# EAGLE board schema (EAGLE 8.6.0)
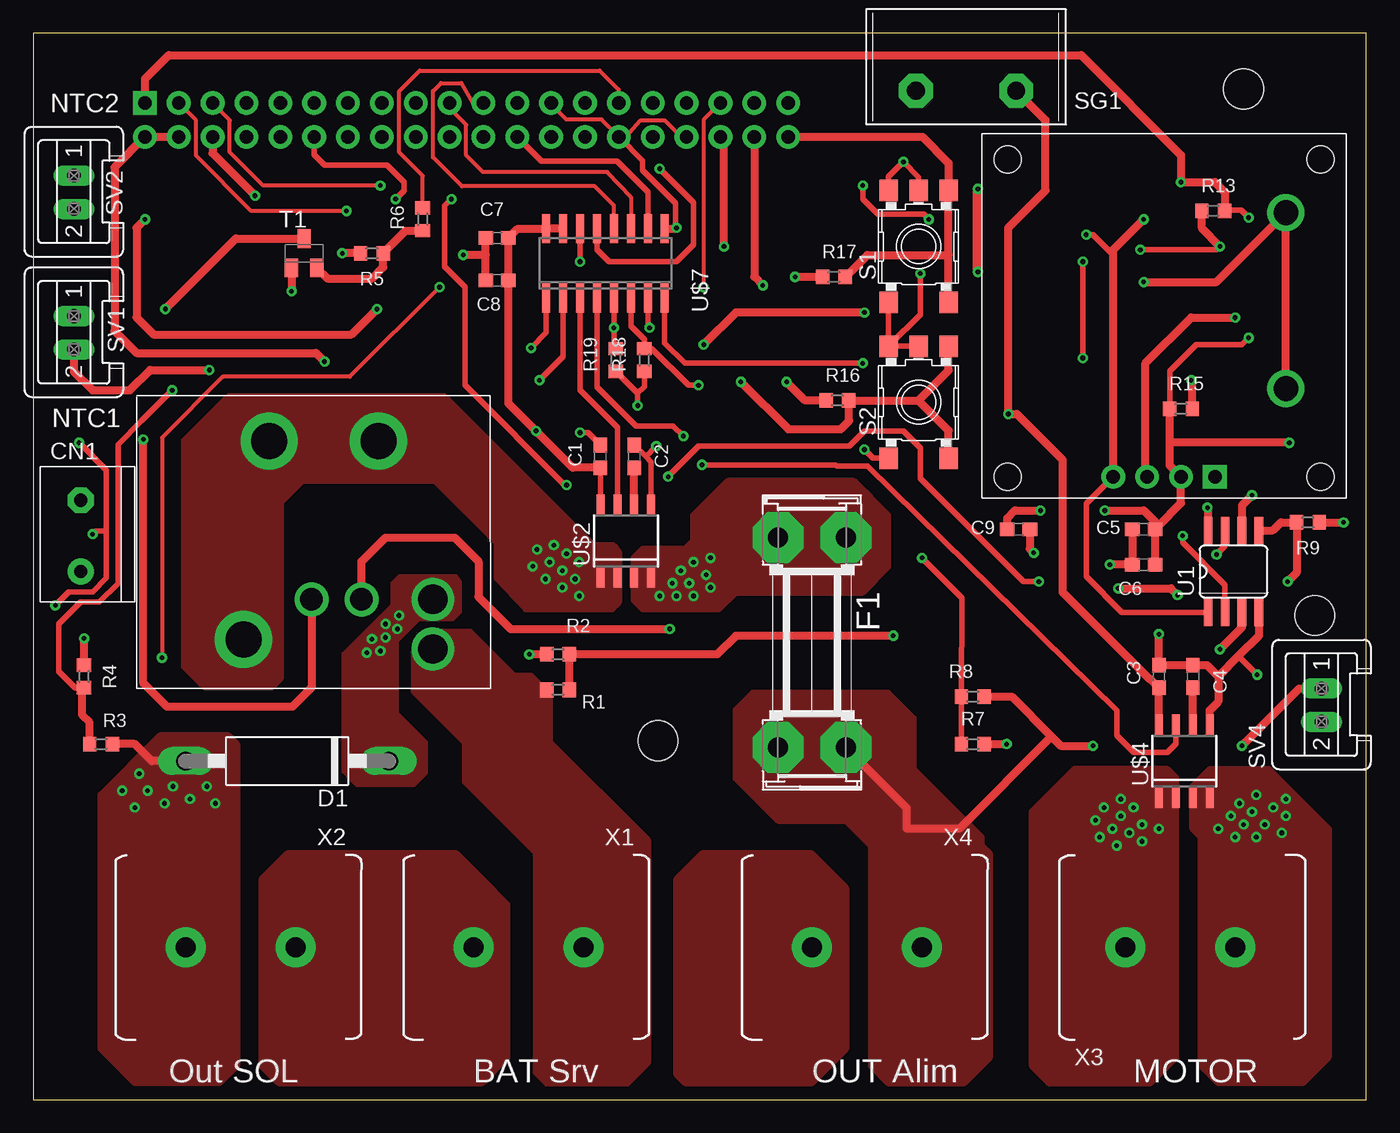
[diagram p0: board, top side]
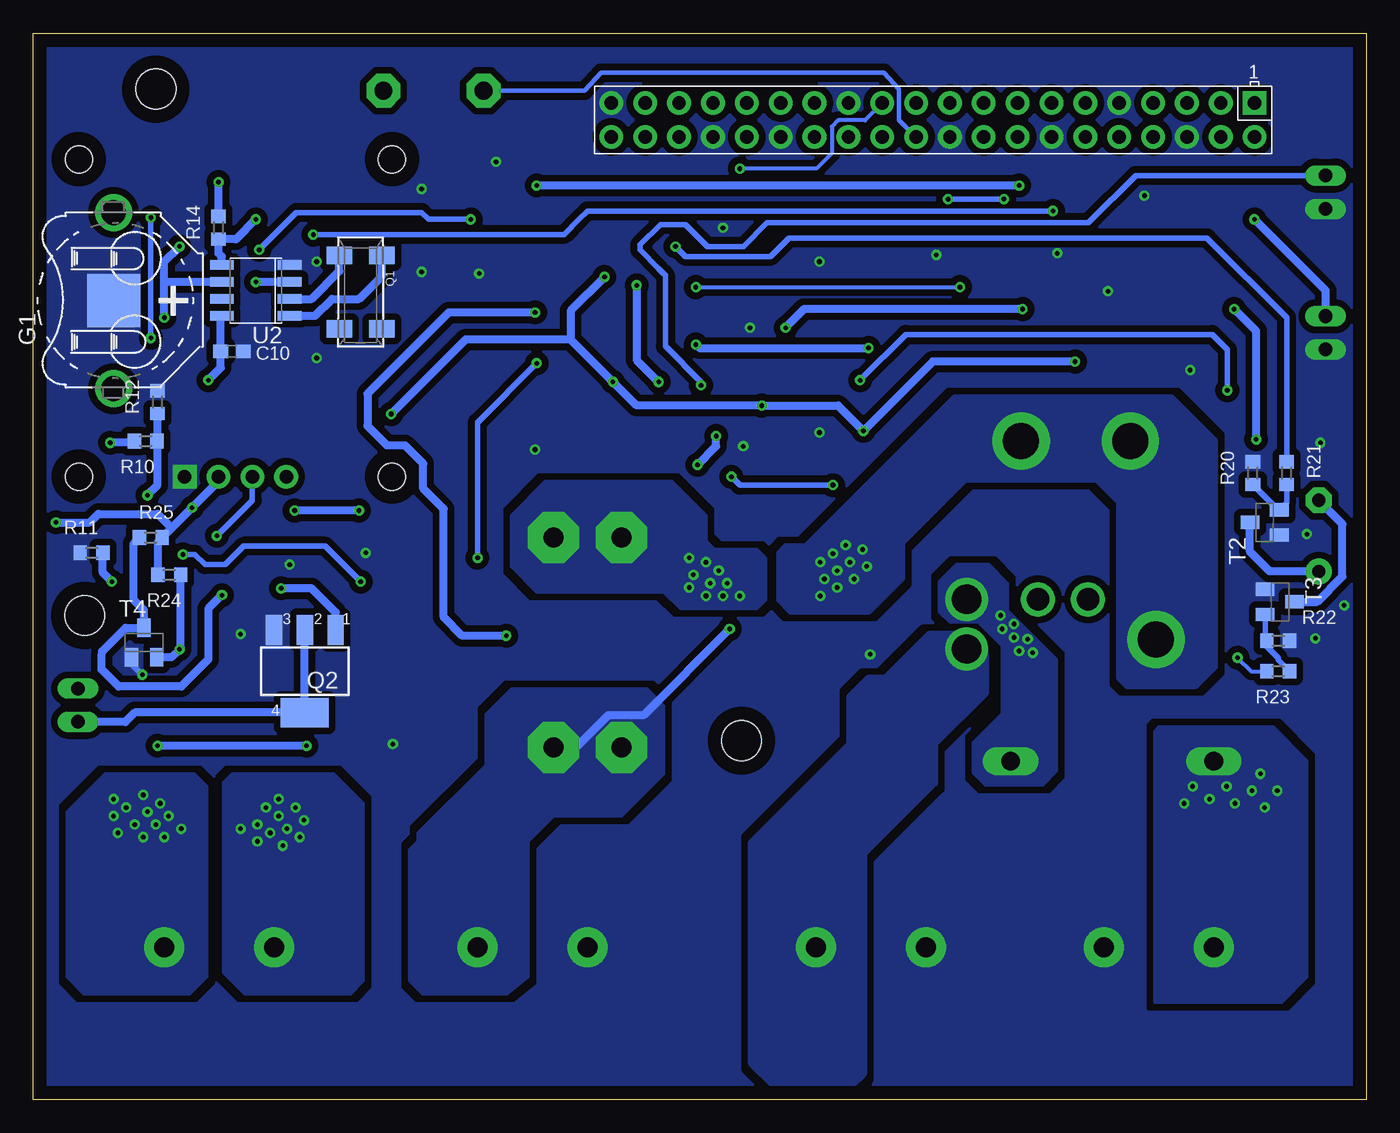
[diagram p1: board, bottom side, seen from below]

Size 100 x 80 mm. Coordinates in mm from the lower left corner, seen from the top.
Outline: 0,0 100,0 100,80 0,80 0,0
Copper layers (1*16): Top 0.035mm / dielectric 1.5mm / Bottom 0.035mm
Design rules "default *": minimum track width 8mil, minimum drill 0.35mm, track to track 8mil, track to pad 8mil, pad to pad 8mil, via to via 8mil, smd to smd 8mil, copper to edge 40mil, drill to drill 6mil, minimum pad ring 10mil, minimum via ring 8mil, stop-mask expansion 4mil, vias tented up to drill 0mil, thermal gap 10mil
Holes 3 mm at 90.81,75.82 96.14,36.32 46.86,26.92

## Footprints (pad centres in the part's own frame; a part is rotated, then mirrored left to right if it is on the bottom)
C0603 = smd 1.1 x 1: 1 -0.85,0; 2 0.85,0
CN02 = drill 1 pad 1.93 octagon: P$1 -2.794,0 | drill 1 pad 1.93: P$2 2.54,0
C1702-15 = drill 1.397 long: A 7.62,0; C -7.62,0
SHK20Q = drill 1.5 pad 3.81 octagon: 1A -7.874,2.54; 1B -7.874,-2.54; 2A 7.874,2.54; 2B 7.874,-2.54
CELL_RETAINER_11.6MM = smd 3.96 x 3.96: N- 0,0 | drill 1.85 pad 2.54: P+@1 -6.605,0; P+@2 6.605,0
8.2X3.8 = smd 1.3 x 1.9: 1 -2.75,-1.6; 2 2.75,-1.6; 3 2.75,1.6; 4 -2.75,1.6
SOT223 = smd 1.219 x 2.235: 1 -2.311,-3.099; 2 0,-3.099; 3 2.311,-3.099 | smd 3.6 x 2.2: 4 0,3.099
R0603 = smd 1 x 1.1: 1 -0.85,0; 2 0.85,0
HFKP-1X5 = drill 2.7 pad 4.3: COM$1 14.2,14.88; COM$2 12.28,0; COM$3 4.08,0 | drill 2.2 pad 3.1: NC 0,15.6; NO 0,11.87 | drill 1.7: P$1 5.35,11.87; P$2 9.1,11.87
SKHMPXE010 = smd 1.6 x 1.4: 1 -4.2,2.25; 2 4.2,2.25; 3 -4.2,-2.25; 4 4.2,-2.25; 5 4.2,0
B/C11S = drill 1.321 pad 2.54 octagon: 1 -3.759,0; 2 3.759,0
S02P = drill 1.016 long: 1 1.25,0; 2 -1.25,0
SOT23-EBC = smd 1 x 1.4: B 0.95,-1.1; C 0,1.1; E -0.95,-1.1
SO08 = smd 0.66 x 2.032: 1 -1.905,-3.073; 2 -0.635,-3.073; 3 0.635,-3.073; 4 1.905,-3.073; 5 1.905,3.073; 6 0.635,3.073; 7 -0.635,3.073; 8 -1.905,3.073
SO08-IRF = smd 0.72 x 1.78: 1 -1.905,-2.543; 2 -0.635,-2.543; 3 0.635,-2.543; 4 1.905,-2.543; 5 1.905,2.543; 6 0.635,2.543; 7 -0.635,2.543; 8 -1.905,2.543
RASPBERRYPI_V13_J8 = drill 1 pad 1.778 square: 1 2.02,-2.71 | drill 1 pad 1.778: 2 2.02,-0.17; 3 4.56,-2.71; 4 4.56,-0.17; 5 7.1,-2.71; 6 7.1,-0.17; 7 9.64,-2.71; 8 9.64,-0.17; 9 12.18,-2.71; 10 12.18,-0.17; 11 14.72,-2.71; 12 14.72,-0.17; 13 17.26,-2.71; 14 17.26,-0.17; 15 19.8,-2.71; 16 19.8,-0.17; 17 22.34,-2.71; 18 22.34,-0.17; 19 24.88,-2.71; 20 24.88,-0.17; 21 27.42,-2.71; 22 27.42,-0.17; 23 29.96,-2.71; 24 29.96,-0.17; 25 32.5,-2.71; 26 32.5,-0.17; 27 35.04,-2.71; 28 35.04,-0.17; 29 37.58,-2.71; 30 37.58,-0.17; 31 40.12,-2.71; 32 40.12,-0.17; 33 42.66,-2.71; 34 42.66,-0.17; 35 45.2,-2.71; 36 45.2,-0.17; 37 47.74,-2.71; 38 47.74,-0.17; 39 50.28,-2.71; 40 50.28,-0.17
SOIC8 = smd 0.6 x 1.5: 1 -1.905,-2.75; 2 -0.635,-2.75; 3 0.635,-2.75; 4 1.905,-2.75; 5 1.905,2.75; 6 0.635,2.75; 7 -0.635,2.75; 8 -1.905,2.75
OLED-SSD1306 = drill 1.016 pad 1.778 square: GND 3.81,0 | drill 1.016 pad 1.778: SCL -1.27,0; SDA -3.81,0; VCC 1.27,0 | hole 2.032: 11.748,0; 11.748,23.812; -11.748,23.812; -11.748,0
SO16 = smd 0.6 x 2.2: 1 -4.445,-2.6; 2 -3.175,-2.6; 3 -1.905,-2.6; 4 -0.635,-2.6; 5 0.635,-2.6; 6 1.905,-2.6; 7 3.175,-2.6; 8 4.445,-2.6; 9 4.445,2.6; 10 3.175,2.6; 11 1.905,2.6; 12 0.635,2.6; 13 -0.635,2.6; 14 -1.905,2.6; 15 -3.175,2.6; 16 -4.445,2.6
38700-7502 = drill 1.5 pad 3: 1 -8.25,0; 2 0,0

## Placement (x,y rotation side)
C1  [C0603]  42.55,48.26 90 top
C2  [C0603]  45.09,48.26 90 top
C3  [C0603]  84.45,31.75 90 top
C4  [C0603]  87,31.75 270 top
C5  [C0603]  83.31,42.8 180 top
C6  [C0603]  83.31,40.13 180 top
C7  [C0603]  34.8,64.64 180 top
C8  [C0603]  34.8,61.47 180 top
C9  [C0603]  73.91,42.8 180 top
C10  [C0603]  85.09,56.13 0 bottom
CN1  [CN02]  3.56,42.16 270 top
D1  Shottky 20A  [C1702-15]  19.05,25.4 180 top
F1  [SHK20Q]  58.42,34.29 270 top
G1  [CELL_RETAINER_11.6MM]  93.98,59.94 90 bottom
Q1  [8.2X3.8]  75.44,60.58 270 bottom
Q2  [SOT223]  79.63,32.13 180 bottom
R1  [R0603]  39.37,30.73 0 top
R2  [R0603]  39.37,33.4 180 top
R3  [R0603]  5.08,26.67 0 top
R4  [R0603]  3.81,31.75 270 top
R5  [R0603]  25.4,63.5 180 top
R6  [R0603]  29.21,66.04 90 top
R7  [R0603]  70.48,26.67 0 top
R8  [R0603]  70.48,30.23 180 top
R9  [R0603]  95.63,43.31 180 top
R10  [R0603]  91.57,49.4 0 bottom
R11  [R0603]  95.63,41.02 180 bottom
R12  [R0603]  90.68,52.32 90 bottom
R13  [R0603]  88.52,66.67 0 top
R14  [R0603]  86.11,65.41 90 bottom
R15  [R0603]  86.11,51.82 0 top
R16  [R0603]  60.33,52.45 0 top
R17  [R0603]  60.07,61.72 0 top
R18  [R0603]  45.85,55.5 90 top
R19  [R0603]  43.69,55.5 90 top
R20  [R0603]  8.51,46.99 90 bottom
R21  [R0603]  5.97,46.99 90 bottom
R22  [R0603]  6.6,34.42 0 bottom
R23  [R0603]  6.6,32.13 180 bottom
R24  [R0603]  89.79,39.37 180 bottom
R25  [R0603]  91.19,42.16 0 bottom
RL1  [HFKP-1X5]  29.97,49.4 180 top
S1  [SKHMPXE010]  66.42,64.01 90 top
S2  [SKHMPXE010]  66.42,52.32 90 top
SG1  [B/C11S]  69.98,75.69 180 top
SV1  [S02P]  3.05,57.53 90 top
SV2  [S02P]  3.05,68.07 90 top
SV4  [S02P]  96.65,29.59 90 top
T1  [SOT23-EBC]  20.32,63.5 0 top
T2  [SOT23-EBC]  7.62,43.31 90 bottom
T3  [SOT23-EBC]  6.48,37.34 270 bottom
T4  [SOT23-EBC]  91.69,34.29 0 bottom
U1  LM75  [SO08]  90.04,39.62 0 top
U2  [SO08-IRF]  83.31,60.71 90 bottom
U$1  RPI-ZERO  [RASPBERRYPI_V13_J8]  6.35,72.06 180 bottom
U$2  ACS712  [SOIC8]  44.45,41.91 0 top
U$4  ACS712  [SOIC8]  86.36,25.4 0 top
U$6  IIC_OLED_SSD1306  [OLED-SSD1306]  84.84,46.74 0 top
U$7  MCP3008SL  [SO16]  42.93,62.74 0 top
X1  38700-7502  [38700-7502]  33.02,11.43 180 top
X2  38700-7502  [38700-7502]  11.43,11.43 180 top
X3  38700-7502  [38700-7502]  90.17,11.43 0 top
X4  38700-7502  [38700-7502]  58.42,11.43 180 top

## Library data of the parts
C1-C10 = eagle-ltspice; SPICEMODEL: NONE; SPICEPREFIX: C
CN1 RL1 U2 U$1 U$2 U$4 U$6 = mylib
D1 = diode
F1 = fuse; OC_FARNELL: unknown; OC_NEWARK: unknown
G1 = battery; MF: KEYSTONE
Q1 = crystal-geyer_V1_0
Q2 = linear
R1-R25 = eagle-ltspice; SPICEMODEL: NONE; SPICEPREFIX: R
S1 S2 = switch
SG1 = buzzer
SV1 SV2 SV4 = con-amp-mt
T1 = transistor-neu-to92
T2-T4 = transistor
U1 = umaxim
U$7 = MCP3008
X1-X4 = mylib; OC_FARNELL: unknown; OC_MOUSER: 538-38700-7502; OC_NEWARK: unknown

## Nets
3V3: C5.1 C6.1 C9.2 R9.1 R10.1 R13.2 R14.2 R15.1 R24.2 R25.2 U1.8 U$1.1 U$6.VCC
+5V: C1.1 C3.1 C7.1 C8.1 R16.1 R17.1 R18.1 R19.1 SG1.1 U$1.2 U$1.4 U$2.8 U$4.8 U$7.15 U$7.16
CE0: U$1.24 U$7.10
GND: C1.2 C2.2 C3.2 C4.1 C5.2 C6.2 C7.2 C8.2 C9.1 C10.2 G1.N- Q2.3 R2.2 R4.1 R5.2 R7.2 R11.2 R12.2 R20.2 R22.2 S1.1 S1.2 S1.5 S2.1 S2.2 S2.5 SV1.2 SV2.2 T1.E T2.E T3.E T4.E U1.4 U2.4 U$1.6 U$1.9 U$1.14 U$1.20 U$1.25 U$1.30 U$1.34 U$1.39 U$2.5 U$4.5 U$6.GND U$7.7 U$7.9 U$7.14 X1.2 X2.1 X4.2
MEAS_0: R1.2 R2.1 U$7.1
MEAS_1: R3.1 R4.2 U$7.2
MEAS_C: U$2.7 U$7.3
MEAS_M: U$4.7 U$7.4
MEAS_O: R7.1 R8.2 U$7.8
MISO: U$1.21 U$7.12
MOSI: U$1.19 U$7.11
N$1: R1.1 RL1.NC X1.1
N$2: R9.2 R11.1 U1.5
N$3: RL1.COM$1 RL1.COM$2 RL1.COM$3 U$2.1 U$2.2
N$4: D1.A R3.2 X2.2
N$5: D1.C RL1.NO
N$6: C4.2 U$4.6
N$7: F1.1A F1.1B U$2.3 U$2.4
N$8: U$4.1 U$4.2 X3.1
N$9: C2.1 U$2.6
N$10: U$4.3 U$4.4 X3.2
N$12: R5.1 R6.1 T1.B
N$13: R10.2 R12.1 U1.6
N$14: RL1.P$2 T1.C
N$15: R6.2 U$1.29
N$16: U1.7 U$1.12
N$17: SG1.2 U$1.22
N$18: G1.P+@1 G1.P+@2 U2.3
N$19: Q1.4 U2.1
N$20: Q1.1 U2.2
N$21: C10.1 R15.2 U2.8
N$22: R16.2 S2.3 S2.4 U$1.38
N$23: R17.2 S1.3 S1.4 U$1.40
N$24: CN1.P$2 T2.C
N$25: R20.1 R21.1 T2.B
N$26: R19.2 SV1.1 U$7.5
N$27: R18.2 SV2.1 U$7.6
N$28: R21.2 U$1.36
N$29: CN1.P$1 T3.C
N$30: R22.1 R23.1 T3.B
N$31: R24.1 T4.B U1.3
N$32: R23.2 U$1.35
N$33: Q2.1 R25.1 T4.C
N$35: Q2.2 Q2.4 SV4.2
SCK: U$1.23 U$7.13
SCL: R13.1 U1.2 U2.6 U$1.5 U$6.SCL
SDA: R14.1 U1.1 U2.5 U$1.3 U$6.SDA
VDD: F1.2A F1.2B R8.1 RL1.P$1 SV4.1 X4.1

## Tracks (layer width: path | path; a pad name or v marks a point on that pad's centre or on a via)
3V3  (via drill 0.35)
  Top 0.406: R15.1 85.26,54.65 87.25,56.64 90.68,56.64 v91.19,57.15 | v91.19,66.17 90.64,66.71 89.41,66.71
  Top 0.61: C6.1 C5.1 84.44,43.07 | U$1.1 8.37,76.57 10.16,78.36 78.61,78.36 86.11,70.87 v86.11,68.83 88.65,68.83 89.41,68.07 89.41,66.71 R13.2 | 84.44,43.07 86.11,44.74 U$6.VCC 85.27,47.57 85.27,49.4 | 85.27,49.4 85.27,51.8 R15.1 | v94.23,49.28 85.39,49.28 85.27,49.4 | R9.1 v98.3,43.31 | U1.8 88.14,44.36 v88.09,44.41 | C9.2 73.06,43.6 73.66,44.2 v75.56,44.2 | v80.39,44.2 83.31,44.2 84.44,43.07
  Bottom 0.406: v91.19,57.15 v91.19,66.17
  Bottom 0.61: R14.2 v86.11,68.83 | R10.1 92.54,49.28 v94.23,49.28 | R24.2 90.64,41.86 R25.2 89.62,42.88 | 89.62,42.88 v88.09,44.41 86.11,46.39 U$6.VCC | v98.3,43.31 95.76,43.31 95.12,43.94 90.68,43.94 89.62,42.88 | v75.56,44.2 v80.39,44.2
+5V  (via drill 0.35)
  Top 0.406: U$2.8 C1.1 | R19.1 45.34,53 | 45.34,53 v45.34,52.07 | 45.34,53 45.85,53.51 R18.1
  Top 0.61: U$4.8 C3.1 83.81,31.54 83.75,31.54 77.22,38.07 77.22,48.01 73.79,51.44 v73.15,51.44 73.15,65.41 75.95,68.2 75.95,73.48 SG1.1 | U$7.15 U$7.16 36.34,65.34 C7.1 C8.1 35.65,52.24 v37.72,50.16 40.47,47.41 C1.1 | U$1.4 U$1.2 6.1,69.96 6.1,57.66 7.75,56.01 21.21,56.01 v21.84,55.37 | R16.1 57.91,52.45 v56.52,53.85 | R17.1 v57.15,61.72
  Bottom 0.61: 59.69,57.02 67.56,57.02 v73.15,51.44 | 59.69,57.02 v56.52,53.85 54.74,52.07 v45.34,52.07 39.62,52.07 v37.72,50.16 32.51,55.37 v21.84,55.37 | v57.15,61.72 59.69,59.18 59.69,57.02
CE0
  Top 0.406: U$7.10 46.12,65.83 46.12,68.08 43.79,70.41 38.13,70.41 U$1.24
GND  (via drill 0.35)
  Top 0.305: 44.46,72.23 45.57,73.47 47.37,73.47 48.61,72.23 | U$1.30 42.63,73.53 40.87,73.53 40.01,73.53 38.85,74.69 U$1.25
  Top 0.406: 44.46,72.23 U$1.30 45.72,70.44 45.72,69.72 48.19,67.25 48.19,65.34 | 48.61,72.23 U$1.34 | U$7.7 46.1,58.04 v46.23,57.91 | S1.2 64.17,69.25 v65.28,70.36 66.42,69.22 S1.5 | v78.74,55.63 v78.74,62.87 | S2.1 63,48.12 v62.36,48.77 | 64.28,56.63 S2.2 S2.5 | 64.28,56.63 66.55,58.9 v66.55,61.98 | U$2.5 46.35,47.84 45.95,48.24 | 45.95,48.24 C2.2 | 45.95,48.24 v46.74,49.02 | C1.2 41.62,50.04 v41.02,50.04 | v1.65,37.08 2.67,38.1 4.45,38.1 5.46,39.12 5.46,42.67 | S1.1 64.17,56.73 64.28,56.63 | v91.82,31.87 90.42,33.27 | U$7.14 v41.02,62.87 | v3.43,49.28 5.46,47.24 5.46,42.67 | 5.46,42.67 4.7,42.67 v4.45,42.42
  Top 0.61: R7.2 v73.03,26.67 | v84.45,34.92 C3.2 C4.1 88.05,32.6 88.9,31.75 | U$4.5 88.27,29.21 88.9,29.84 88.9,31.75 | C8.2 33.95,63.37 | 33.95,63.37 C7.2 | 33.95,63.37 v32.26,63.37 | T1.E v19.37,60.64 | R5.2 v23.18,63.5 | R4.1 v3.81,34.61 | U$7.9 48.19,65.34 v48.26,65.41 | v80.77,40.13 C6.2 C5.2 | R2.2 v37.21,33.4 | U1.4 91.95,34.8 90.42,33.27 88.9,31.75 | C9.1 74.76,41.31 v75.06,41.02 | SV1.2 3.05,54.61 4.45,53.21 7.24,53.21 8.76,54.74 v13.21,54.74 | U$1.6 13.45,71 v16.64,67.82
  Top 0.762: v70.87,62.1 v70.87,68.33
  Bottom 0.406: T4.E 92.64,32.7 v91.82,31.87
  pour Top (no thermals): 17.14,15.88 17.14,2.54 18.41,1.27 33.66,1.27 35.56,3.17 35.56,14.61 33.66,16.51 31.75,18.41 19.05,18.41 17.14,16.51
  pour Top (no thermals): 48.9,1.27 58.42,1.27 60.96,3.81 60.96,15.88 58.42,18.41 50.16,18.41 48.26,16.51 48.26,2.54 48.26,1.91
  pour Bottom (isolate 0.508, rank 2, no thermals): 0.32,79.69 99.69,79.69 99.69,0.32 0.32,0.32
MEAS_0  (via drill 0.35)
  Top 0.406: U$7.1 38.48,57.53 v37.34,56.39
  Top 0.61: v62.36,59.05 52.7,59.05 v50.29,56.64 | R1.2 R2.1 51.31,33.4 52.7,34.8 v64.52,34.8
  Bottom 0.61: v64.52,34.8 67.82,34.8 69.22,36.2 69.22,44.32 70.75,45.86 70.75,47.7 72.12,49.07 73.46,49.07 74.93,50.55 74.93,52.96 68.83,59.05 v62.36,59.05 | v50.29,56.64 50.04,56.39 v37.34,56.39
MEAS_1  (via drill 0.35)
  Top 0.406: U$7.2 39.75,55.75 v37.97,53.98 | v10.41,53.21 8.13,50.93 6.35,49.15 6.35,49.14 6.35,38.73 4.95,37.34 3.56,37.34 1.91,35.69 1.91,32.13 3.14,30.9 R4.2
  Top 0.61: R3.1 4.23,28.28 3.68,28.83 3.68,30.77 R4.2
  Bottom 0.406: v37.97,53.98 34.54,57.4 11.56,57.4 10.41,56.26 v10.41,53.21
MEAS_C
  Top 0.406: U$2.7 43.81,50.42 41.02,53.21 U$7.3
MEAS_M  (via drill 0.35)
  Top 0.406: U$4.7 85.72,26.67 85.09,26.04 82.55,26.04 81.28,27.3 81.28,29.21 62.6,47.51 60.3,47.51 60.19,47.62 v50.16,47.62 | v48.77,49.78 48.01,50.55 45.21,50.55 42.29,53.47 U$7.4
  Bottom 0.61: v50.16,47.62 48.77,49.02 v48.77,49.78
MEAS_O  (via drill 0.35)
  Top 0.406: R7.1 R8.2 69.68,37.63 v66.67,40.64 | v62.23,55.24 48.9,55.24 47.37,56.77 U$7.8
  Bottom 0.406: v62.23,55.24 66.67,50.8 v66.67,40.64
MISO
  Top 0.305: U$7.12 43.56,67.08 42.11,68.53 32.15,68.53 29.98,70.7 29.98,75.67 30.59,76.27 32.13,76.27 32.99,74.77 U$1.21
MOSI
  Top 0.305: U$7.11 44.83,67.69 43.05,69.6 33.73,69.6 32.48,70.85 32.48,73.13 31.23,74.37 U$1.19
N$1
  pour Top (no thermals): 38.61,1.14 44.45,1.14 46.1,2.79 46.1,19.43 38.73,26.8 38.73,30.35 37.34,31.75 36.07,31.75 32.77,35.05 30.1,35.05 28.57,33.53 28.57,30.61 32.38,26.8 32.38,23.88 37.72,18.54 37.72,2.03
  pour Bottom (no thermals): 38.61,1.02 44.45,1.02 46.1,2.67 46.1,19.3 38.73,26.67 38.73,30.23 37.34,31.62 36.07,31.62 32.77,34.92 30.1,34.92 28.57,33.4 28.57,30.48 32.38,26.67 32.38,23.75 37.72,18.41 37.72,1.91
N$2  (via drill 0.35)
  Top 0.61: U1.5 92.99,42.7 93.6,43.31 R9.2 94.78,39.54 v94.11,38.86
  Bottom 0.61: v94.11,38.86 94.78,39.54 R11.1
N$3  (via drill 0.35)
  other vias: 37.47,40.01 37.78,41.27 39.05,41.59 40.01,40.96 39.69,39.69 38.73,40.32 38.42,39.05 39.69,38.42 40.96,37.78 40.64,39.05 40.96,40.32
  pour Top (no thermals): 12.83,30.99 17.91,30.99 18.54,31.62 18.54,44.83 20.19,46.48 30.1,46.48 34.8,41.78 34.8,39.12 36.96,36.83 43.43,36.83 43.94,37.34 43.94,41.02 43.56,41.53 42.04,41.53 30.86,52.7 14.61,52.7 11.3,49.4 11.3,32.51
  pour Bottom (no thermals): 12.83,30.99 17.91,30.99 18.54,31.62 18.54,44.83 20.19,46.48 30.1,46.48 34.8,41.78 34.8,39.12 37.34,36.58 43.18,36.58 44.07,37.47 44.07,41.02 43.56,41.53 42.04,41.53 30.86,52.7 14.61,52.7 11.3,49.4 11.3,32.51
N$4  (via drill 0.35)
  Top 0.61: D1.A 8.89,25.4 7.62,26.67 R3.2
  other vias: 7.94,24.45 9.84,22.23 8.57,23.18 10.48,23.5 11.75,22.54 13.02,23.5 13.65,22.23 7.62,21.91 6.67,23.18
  pour Top (no thermals): 15.24,25.4 15.24,2.54 13.97,1.27 7.62,1.27 5.71,3.17 5.08,3.81 5.08,21.59 5.08,22.86 9.53,27.3 14.61,27.3 15.24,26.67
  pour Bottom (no thermals): 15.88,7.3 6.35,7.3 4.45,9.21 4.45,25.4 6.99,27.94 15.56,27.94 15.88,27.62
N$5  (via drill 0.35)
  other vias: 25.02,33.53 25.4,34.54 26.04,33.66 26.42,34.67 26.42,35.69 27.3,35.31 27.43,36.32
  pour Top (no thermals): 24.26,23.62 28.57,23.62 29.46,24.51 29.46,26.8 27.3,28.96 27.3,34.42 28.96,36.07 31.5,36.07 32,36.58 32,38.86 31.75,39.24 27.43,39.24 26.92,38.73 26.92,37.08 23.24,33.4 23.24,24.64
  pour Bottom (no thermals): 24.26,23.62 28.57,23.62 29.46,24.51 29.46,26.8 27.3,28.96 27.3,34.04 29.08,35.81 31.24,35.81 32,36.58 32,38.86 30.73,40.13 28.32,40.13 26.92,38.73 26.92,36.7 23.24,33.02 23.24,24.64
N$6
  Top 0.61: U$4.6 C4.2
N$7  (via drill 0.35)
  other vias: 46.99,37.78 47.94,38.73 48.26,37.78 49.53,37.78 49.21,38.73 48.58,39.69 49.53,40.32 50.8,40.64 50.48,39.37 50.8,38.42
  pour Top (no thermals): 45.09,40.64 45.09,37.47 45.72,36.83 51.44,36.83 52.7,38.1 62.23,38.1 64.14,40.01 64.14,43.81 61.59,46.35 60.33,46.35 52.07,46.35 51.44,45.72 49.53,43.81 49.53,41.91 48.9,41.27 45.72,41.27
  pour Bottom (no thermals): 45.09,40.64 45.09,37.47 45.72,36.83 51.44,36.83 52.7,38.1 62.23,38.1 64.14,40.01 64.14,43.81 61.59,46.35 52.07,46.35 49.53,43.81 49.53,41.91 48.9,41.27 45.72,41.27
N$8  (via drill 0.35)
  other vias: 81.28,19.05 80.01,19.68 79.69,20.95 80.33,21.91 81.6,22.54 81.6,21.27 80.96,20.32 82.23,20 83.19,19.37 83.19,20.64 82.55,21.91 84.45,20.32
  pour Top (no thermals): 76.2,1.27 83.82,1.27 85.72,3.17 85.72,24.13 85.09,24.77 78.11,24.77 74.93,21.59 74.93,3.17 74.93,2.54
  pour Bottom (no thermals): 76.52,7.94 84.14,7.94 85.72,9.53 85.72,23.81 85.09,24.45 77.47,24.45 75.25,22.23 75.25,8.89 76.2,7.94
N$9
  Top 0.61: U$2.6 C2.1
N$10  (via drill 0.35)
  other vias: 88.9,20.32 89.85,21.27 90.49,22.23 91.76,22.86 91.44,21.59 90.81,20.64 90.17,19.68 91.76,19.68 92.39,20.64 93.03,21.91 93.98,22.54 93.98,21.27 93.66,20
  pour Top (no thermals): 87.63,6.99 87.63,19.68 87,20.32 87,23.5 88.27,24.77 92.71,24.77 93.34,24.13 97.16,20.32 97.16,4.45 97.16,3.17 95.25,1.27 88.9,1.27 87.63,2.54
  pour Bottom (no thermals): 88.9,7.94 96.2,7.94 97.47,9.21 97.47,21.59 94.61,24.45 87.95,24.45 87,23.5 87,9.21 88.27,7.94
N$12
  Top 0.61: T1.B 22.07,61.59 25.4,61.59 26.25,62.45 R5.1 27.94,65.19 R6.1
N$13  (via drill 0.35)
  Top 0.61: v91.44,45.34 90.68,44.58 U1.6
  Bottom 0.61: R12.1 90.68,49.44 R10.2 90.72,46.06 v91.44,45.34
N$14  (via drill 0.35)
  Top 0.61: RL1.P$2 20.87,30.91 19.43,29.46 10.03,29.46 8.26,31.24 v8.26,49.53 | v9.91,59.31 15.2,64.6 T1.C
  Bottom 0.61: v8.26,49.53 8.26,57.66 v9.91,59.31
N$15
  Top 0.305: R6.2 29.21,69.31 27.45,71.08 27.45,75.67 28.99,77.21 42.49,77.21 43.91,75.79 U$1.29
N$16  (via drill 0.35)
  Top 0.406: U$1.12 21.07,70.88 21.84,70.1 26.54,70.1 27.81,68.83 27.81,68.2 v27.18,67.56 | v31.37,67.56 30.86,67.05 30.86,62.48 32.38,60.96 32.38,53.59 40.01,45.97 v40.01,46.1 | v47.62,46.74 49.91,49.02 61.21,49.02 62.36,50.16 65.28,50.16 66.55,48.9 66.55,46.61 74.3,38.86 v75.44,38.86 75.56,38.86 | v88.77,40.89 89.41,41.53 U1.7
  Bottom 0.406: v27.18,67.56 v31.37,67.56 | v40.01,46.1 46.99,46.1 v47.62,46.74 | v75.44,38.86 78.11,41.53 84.2,41.53 85.6,40.13 87.12,40.13 87.88,40.89 v88.77,40.89
N$17
  Bottom 0.356: SG1.2 58.65,75.69 57.41,77.06 36.16,77.06 35.04,75.8 35.04,73.5 U$1.22
N$18  (via drill 0.35)
  Top 0.61: v83.31,61.34 88.77,61.34 G1.P+@2 G1.P+@1
  Bottom 0.61: U2.3 v83.31,61.34
N$19
  Bottom 0.61: U2.1 78.87,58.8 77.6,60.07 75.56,60.07 73.84,61.8 Q1.4
N$20
  Bottom 0.61: U2.2 79.12,60.07 77.04,62.15 Q1.1
N$21  (via drill 0.35)
  Top 0.61: R15.2 86.96,53.89 v86.87,53.98
  Bottom 0.61: v86.87,53.98 85.94,54.9 C10.1 85.94,58.72 U2.8
N$22  (via drill 0.35)
  Top 0.61: 66.42,52.45 R16.2 61.17,50.97 61.21,50.93 60.58,50.29 56.64,50.29 v53.09,53.85 | S2.4 68.67,54.7 66.42,52.45 | S2.3 68.67,50.2 66.42,52.45 | U$1.38 54.09,61.73 v54.74,61.09
  Bottom 0.61: v54.74,61.09 54.74,55.5 v53.09,53.85
N$23
  Top 0.61: S1.3 68.67,63.37 | 68.67,63.37 S1.4 68.67,70.27 66.71,72.23 U$1.40 | R17.2 62.57,63.37 68.67,63.37
N$24
  Bottom 0.61: CN1.P$2 7.24,39.62 8.72,41.1 T2.C
N$25
  Bottom 0.406: R21.1 5.97,44.81 T2.B 6.63,44.26 R20.1
N$26  (via drill 0.35)
  Top 0.406: R19.2 43.56,56.48 v43.56,57.91 U$7.5
  Top 0.61: v8.38,66.04 7.75,65.41 7.75,58.67 9.02,57.4 23.88,57.4 v25.78,59.31
  Bottom 0.61: SV1.1 3.05,60.71 v8.38,66.04 | v25.78,59.31 42.16,59.31 v43.56,57.91
N$27  (via drill 0.35)
  Top 0.406: U$7.6 44.83,58.04 45.85,57.02 R18.2 46.39,56.35 49.15,53.59 v49.91,53.59
  Bottom 0.406: SV2.1 17.29,69.32 20.83,65.79 44.96,65.79 46.74,64.01 49.4,64.01 51.05,65.66 52.96,65.66 54.48,64.14 54.48,63.75 53.09,62.36 52.7,61.98 52.58,61.85 52.58,56.52 49.91,53.85 v49.91,53.59
N$28  (via drill 0.35)
  Top 0.61: v51.82,64.01 51.82,71.96 U$1.36
  Bottom 0.406: R21.2 5.97,58.67 11.94,64.64 43.31,64.64 44.7,63.25 51.05,63.25 v51.82,64.01
N$29
  Bottom 0.61: T3.C 3.68,37.34 1.78,39.24 1.78,43.18 CN1.P$1
N$30
  Bottom 0.406: R23.1 6.6,32.98 6.6,33.15 7.45,34 R22.1 7.58,34.54 T3.B
N$31  (via drill 0.35)
  Top 0.61: v89.03,33.78 90.68,35.43 U1.3
  Bottom 0.61: T4.B 89.62,33.19 v89.03,33.78 88.94,33.87 R24.1
N$32  (via drill 0.35)
  Top 0.305: U$1.35 50.29,73.51 v50.29,60.96 | v30.48,60.96 23.75,54.23 14.22,54.23 9.65,49.66 v9.65,33.15
  Bottom 0.305: v50.29,60.96 v30.48,60.96 | v9.65,33.15 8.64,32.13 R23.2
N$33  (via drill 0.35)
  Top 0.61: v81.41,38.35 85.34,38.35 v85.85,37.85
  Bottom 0.61: R25.1 92.46,41.74 92.46,37.47 91.69,36.7 T4.C 93.08,35.39 94.84,33.63 94.87,33.25 94.87,32.26 93.6,30.99 88.9,30.99 86.87,33.02 86.87,36.83 v85.85,37.85 | Q2.1 77.32,36.55 79.12,38.35 v81.41,38.35
N$35
  Bottom 0.61: SV4.2 96.63,28.32 93.09,28.32 92.38,29.03 Q2.4 Q2.2
SCK  (via drill 0.35)
  Top 0.406: v46.99,69.85 49.53,67.31 49.53,64.14 48.26,62.87 43.18,62.87 42.29,63.75 U$7.13
  Bottom 0.305: v46.99,69.85 41.25,69.85 40.09,71 40.09,73 39.62,73.47 37.6,73.47 U$1.23
SCL  (via drill 0.35)
  Top 0.305: U$1.5 14.74,73.47 14.74,71.08 17.25,68.58 v26.04,68.58
  Top 0.406: U1.2 89.41,38.61 86.23,41.78 v86.23,42.29 | v62.23,68.58 62.23,67.56 63.37,66.42 66.8,66.42 v67.18,66.04 | v83.06,63.75 88.77,63.75 v89.03,64.01
  Top 0.61: U$6.SCL 83.44,46.99 83.44,55.24 86.87,58.67 v90.17,58.67 | v89.03,64.01 87.67,65.37 R13.1
  Bottom 0.406: v86.23,42.29 83.57,44.96 U$6.SCL | v67.18,66.04 70.36,66.04 70.87,66.55 80.26,66.55 v83.06,63.75
  Bottom 0.61: v26.04,68.58 v62.23,68.58 | v90.17,58.67 90.17,61.34 | 90.17,61.34 90.17,62.87 v89.03,64.01 | U2.6 90.17,61.34
SDA  (via drill 0.35)
  Top 0.305: U$1.3 12.21,73.47 12.21,70.83 16.36,66.67 v23.5,66.67
  Top 0.406: U1.1 81.69,36.55 78.99,39.24 78.99,44.7 U$6.SDA | v78.99,64.9 79.5,64.9 81.03,63.37
  Top 0.61: v83.31,66.04 81.03,63.75 81.03,63.37 U$6.SDA
  Bottom 0.406: v23.5,66.67 58.42,66.67 59.05,66.04 60.2,64.9 v78.99,64.9
  Bottom 0.61: U2.5 85.86,63.25 86.11,63.5 R14.1 84.8,64.56 v83.31,66.04
VDD  (via drill 0.35)
  Top 0.61: RL1.P$1 24.62,40.37 26.42,42.16 31.62,42.16 33.4,40.39 33.4,37.72 35.81,35.31 v47.75,35.31 | R8.1 73.41,30.23 76.39,27.24 | v79.5,26.54 77.09,26.54 76.39,27.24 | v90.68,26.54 94.98,30.84 SV4.1 | 76.39,27.24 69.47,20.32 65.53,20.32 65.53,21.84 F1.2A
  Bottom 0.61: v47.75,35.31 54.23,28.83 56.88,28.83 59.29,26.42 F1.2A | v79.5,26.54 v90.68,26.54
  pour Top (no thermals): 52.7,24.13 55.88,20.95 60.96,20.95 62.87,19.05 62.87,2.54 64.14,1.27 69.85,1.27 71.75,3.17 71.75,18.41 71.12,19.05 71.12,19.68 66.04,24.77 66.04,28.57 65.41,29.21 64.14,30.48 53.98,30.48 52.7,29.21
  pour Bottom (no thermals): 52.7,24.45 55.88,21.27 60.96,21.27 62.87,19.37 62.87,9.21 64.45,7.94 70.8,7.94 71.75,8.89 71.75,18.73 71.12,19.37 71.12,20 66.04,25.08 66.04,28.89 64.14,30.8 53.98,30.8 52.7,29.53

## Text on the board
tPlace: NTC2 | NTC1
tNames: Out SOL | BAT Srv | OUT Alim | MOTOR
tValues: BUZZER